# Altium PCB oximonitor.PcbDoc
Units mil, origin at the board's own origin, x right, y up, seen from the top; angles counter-clockwise.
Board outline 4970 x 1515 mil, 2 copper layers (Top Layer, Bottom Layer); 18 components, 11 nets, 43 pads, 1 vias.
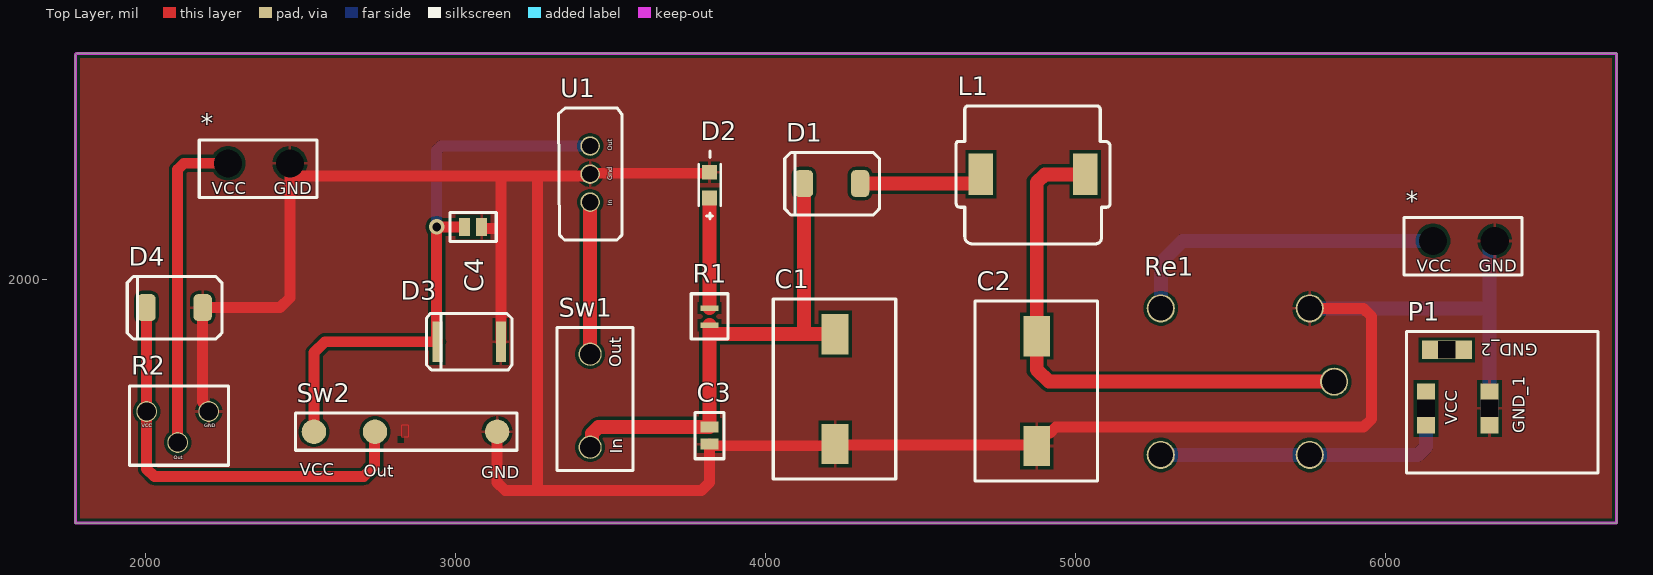
[diagram p0: Top Layer view]
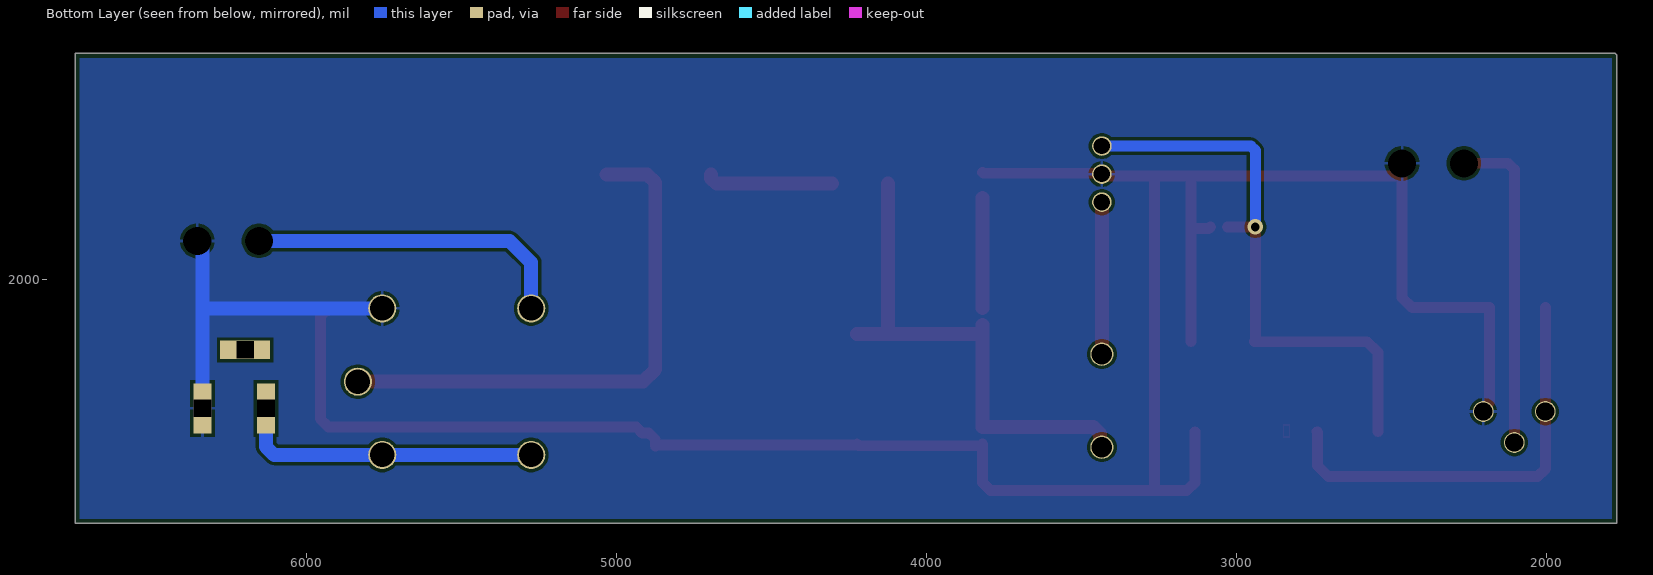
[diagram p1: Bottom Layer view, seen from below]

## Layer stack, top to bottom
Top Solder: solder mask 0.4, Solder Resist, Dk 3.5
Top Layer: signal copper 1.4
Dielectric 1: dielectric 12.6, FR-4, Dk 4.8
Bottom Layer: signal copper 1.4
Bottom Solder: solder mask 0.4, Solder Resist, Dk 3.5

## Board outline
1775,1215 6745,1215 6745,2730 1780,2730 1775,2725

## Design rules (kind name [scope] priority, off if disabled: settings)
Clearance [All] p1: gap=10 ignorepadtopadclearanceinfootprint=FALSE except(0: Arc-Hole Track-Hole SMDPad-Hole THPad-Hole Via-Hole Fill-Hole Poly-Hole Region-Hole Text-Hole)
HoleSize [All] p1: absolutevalues=TRUE maxlimit=150 minlimit=1 maxpercent=80.000 minpercent=20.000
PolygonConnect [All] p1: connectstyle=Relief reliefconductorwidth=10 reliefentries=4 polygonreliefangle="90 Angle" airgapwidth=10
RoutingVias [All] p1: holewidth=28 width=50 viastyle="Through Hole" minholewidth=28 minwidth=50 maxholewidth=28 maxwidth=50
SilkToSolderMaskClearance [IsPad] p1: minsilkscreentomaskgap=3 clearancetoexposedcopper=TRUE
SolderMaskExpansion [All] p1: expansion=4 istentingtop=FALSE
Width [All] p1: maxlimit=45 minlimit=15 preferedwidth=25
28 further rules are at their usual default settings.

## Classes and differential pairs
component class oximonitor: * C1 C2 C3 C4 D1 D2 D3 D4 L1 P1 R1 R2 Re1 Sw1 Sw2 U1

## Components (designator, comment, footprint, x,y, rotation, side; value= is the part's Value field where it differs from the comment)
* "Component_1" "Header 2" 6155,2125 r0 top
* "Component_1" "Header 2" 2270,2375 r0 top
C1 "Capacitor 470uF" "Capacitor SMD 470uF 16V" 4225,1706.22 r270 top
C2 "Capacitor 470uF" "Capacitor SMD 470uF 16V" 4875,1700 r270 top
C3 "Capacitor 0.1uF" "Capacitor 0603 0.1uF" 3820,1525 r270 top
C4 "Capacitor 0.1uF" "Capacitor 0603 0.1uF" 3029.88,2170 r0 top
D1 "Diode 3A 1kV" "Diode 3A - 1kV (SMD)" 4215,2310 r180 top
D2 "LED" "oximonitor led" 3820,2305 r90 top
D3 "Diode zenner 12V 1W" Diode_zenner12V_1W 3045,1800 r180 top
D4 "Diode 3A 1kV" "Diode 3A - 1kV (SMD)" 2095,1910 r180 top
L1 "Inductor 470uH" "Inductor 470uH" 4863.31,2340 r180 top
P1 "Jack DC" "Jack DC" 6335,1585 r90 top
R1 "Resitor 330Ohm" "Resistor 0805" 3820,1880 r90 top
R2 "Pot-hg 200 Ohm" "Pot-hg resistor 220 Ohm" 2005,1575 r0 top
Re1 "Relay" "Relay 12VDC" 5275,1435 r90 top
Sw1 "Dip Switch" "Dip Switch" 3435,1460 r90 top
Sw2 "Touch Switch" "Touch Switch" 2544.45,1510 r0 top
U1 "LM7805" LM7805 3435,2340.55 r90 top

## Footprints (in the part's own frame and the unit in brackets; to place one, negate y for a bottom-side part, rotate by r counter-clockwise, add the part's x,y. Pads: shape width x height; smd on the part's side, far side on the other; paste and mask are expansions set on the pad)
"Capacitor 0603 0.1uF" [mm] "Capacitor 0603 0.1uF"
  rect 0.9x1.5 smd paste-2539.97 mask-2539.97: 1(0,0) 2(1.4,0)
  silkscreen extent -1.2,-1.2 2.6,1.2, body extent -0.25,-0.55 1.65,0.55, height 0.8
"Capacitor SMD 470uF 16V" [mm] "Capacitance: 470uF"
  rect 3.3x2.2 smd paste-2539.97 mask-2539.97: 1(-3,0) 2(6,0)
  silkscreen extent -5.88,-5.07 8.85,4.97, body extent -2.68,-4.21 5.64,4.1, height 3
"Diode 3A - 1kV (SMD)" [mm] "Diode 3A - 1kV"
  rrect50% 1.5x2.2 smd paste-2539.97 mask-2539.97: +(-2.3,0) -(2.3,0)
  silkscreen extent -3.88,-2.55 3.88,2.58, body extent -2.35,-1.97 2.35,1.97, height 2.44
Diode_zenner12V_1W [mm]
  rect 0.8x3.3 smd paste-2539.97 mask-2539.97: +(-2.6,0) -(2.6,0)
  silkscreen extent -3.5,-2.3 3.5,2.3, body extent -2.54,-2.54 2.54,2.54, height 2.6
"Dip Switch" [mm]
  round 1.9 hole 1.7 paste-2539.97 mask-2539.97: In(0,0) Out(7.62,0)
  silkscreen extent -1.9,-3.5 9.8,2.7, body extent -1.05,-2.05 8.85,1.85, height 7.05
"Header 2" [mm]
  round 2 hole 2.3 paste-2539.97 mask-2539.97: GND(5,0) VCC(-0.056,0.009)
  silkscreen extent -2.42,-2.79 7.23,1.91
"Inductor 470uH" [mm] "Inductor 470uH"
  rect 2x3.4 smd paste-2539.97 mask-2539.97: 1(-4.275,0) 2(4.275,0)
  silkscreen extent -6.3,-5.6 6.3,5.7, body extent -5.15,-5.15 5.18,5.07, height 3.8
"Jack DC" [mm] "DC5525"
  rect 4.1x1.5 hole 1.4 square paste-2539.97 mask-2539.97: GND_1(0,0) VCC(0,5.2)
  rect 1.5x4.1 hole 1.4 square paste-2539.97 mask-2539.97: GND_2(4.8,3.5)
  silkscreen extent -5.3,-8.9 6.3,6.8, body extent -4.7,-8.2 4.3,6, height 11
LM7805 [mm]
  round 1.6 hole 1.33 paste-2539.97: GND(0,0) Input(-2.3,0) Output(2.3,0)
  silkscreen extent -5.4,-2.6 5.4,2.6, body extent -5.1,-2.25 5.1,2.25, height 14.48
"oximonitor led" [mm] "led"
  rect 1.2x1.2 smd: +(-1.05,0) -(1.05,0)
  silkscreen extent -2.78,-0.92 2.78,0.9, body extent -1,-0.53 1,0.53, height 0.25
"Pot-hg resistor 220 Ohm" [mm]
  round 1.7 hole 1.5 paste-2539.97 mask-2539.97: GND(5.08,0) Out(2.54,-2.54) VCC(0,0)
  silkscreen extent -1.4,-4.4 6.7,2.1, body extent -0.62,-3.52 5.78,1.23, height 6.6
"Relay 12VDC" [mm]
  round 2.3 hole 2 paste-2539.97 mask-2539.97: In+(0,-12.2) In-(12,-12.2) NC(12,0) NO(0,0) Out(6,-14.2)
  body extent -1.7,-16 13.9,1.6, height 15.8
"Resistor 0805" [mm]
  rect 0.45x1.45 smd paste-2539.97 mask-2539.97: 1(-0.675,0) 2(0.725,0)
  silkscreen extent -1.8,-1.5 1.9,1.5, body extent -0.98,-0.63 1.02,0.67, height 0.25
"Touch Switch" [mm]
  round 2 smd paste-2539.97 mask-2539.97: GND(15,0) Out(5,0) VCC(0,0)
  silkscreen extent -1.52,-1.52 16.64,1.52

## Part data
C3 C4: "Model Samsung 0603. Capacitance 0.1uF"
D1 D4: "https://www.thegioiic.com/1n5408-s3m-smb-diode-chinh-luu-3a-1kv"
D2: "LED 0805"
D3: "https://www.thegioiic.com/zm4742a-gs08-diode-zener-12v-1w-smd"
P1: "https://www.thegioiic.com/dc5525-dau-noi-nguon-dc-cai-5525-han-pcb-kim-2-5mm"
R1: "https://www.thegioiic.com/dien-tro-330-ohm-0805-5-"
R2: "https://www.thegioiic.com/3362w-201-bien-tro-200-ohm-3-chan-tinh-chinh-ngang-0-25w"
Re1: "https://nshopvn.com/product/relay-12vdc-10a/?variant=99218"
Sw1: "https://www.thegioiic.com/cong-tac-1-bit-dip-switch-xuyen-lo-2-54mm-mau-do"
Sw2: "https://www.thegioiic.com/ttp223-phim-cam-ung-dien-dung-1-kenh-v3"
U1: "https://www.thegioiic.com/lm7805ct-cn-ic-on-ap-5v-1-5a"

## Via types
v1: diameter 50, hole 28, Top Layer to Bottom Layer, 1 vias

## Nets (pads, with @x,y where several pads share a name; then routed paths per layer and width w, separated by ;. In a path a pad name is that pad's centre, name@x,y a point inside that pad or via, vN(x,y) a via of type N, cw(c..) or ccw(c..) an arc to the next point about the centre after c; other vN are vias at no path point)
GND: *.GND C1.2 C2.2 C3.2 C4.2 D2.- D3.+ D4.+ P1.GND_1 R2.GND Re1.In- Sw2.GND U1.GND | length 8892.4
  Top Layer w35: R2.GND 2205,1586.35 2185.55,1605.79 D4.+ 2435,1910 2466.85,1941.85 2466.85,2335 ; *.GND@2466.85,2375 2466.85,2335 ; C4.2 3089.43,2165.57 3144.21,2165.57 3147.36,2162.42 ; Sw2.GND 3135,1346.36 3161.36,1320 3265,1320 ; D3.+ 3147.36,2162.42 ; C3.2 C3.2@3820,1464.77 ; D2.- 3817.11,2343.44 3437.89,2343.44 U1.GND 3429.45,2335 3265,2335 ; C2.2@4871.89,1466.89 4228.11,1466.89 C1.2 4219.77,1464.77 C3.2@3820,1464.77 ; C2.2 4875,1485.43 4895.81,1506.24 4917.46,1506.24 4936.22,1525 5928.64,1525 5955,1551.36 5955,1881.08 5928.64,1907.44 Re1.In- ; 2466.85,2335 3147.36,2335 ; 3147.36,2162.42 3147.36,2174.89 3147.36,2335 ; 3147.36,2335 3265,2335 ; 3265,1320 3793.64,1320 3820,1346.36 C3.2@3820,1464.77 ; 3265,1320 3265,2335
  Bottom Layer w45: Re1.In- 6327.56,1907.44 6335,1900 ; P1.GND_1 6335,1900 ; *.GND@6351.85,2125 6351.85,2115.87 6335,2099.02 6335,1900
NC: *.VCC@6152.78,2125.37 Re1.NC | length 1054.5
  Bottom Layer w45: Re1.NC 5275,2055 5345.37,2125.37 *.VCC@6152.78,2125.37
Net*_VCC: *.VCC@2267.78,2375.37 R2.Out | length 1051.2
  Top Layer w35: R2.Out 2105,2355 2125.37,2375.37 *.VCC@2267.78,2375.37
NetC1_1: C1.1 C3.1 D1.- R1.1 Sw1.In | length 1654.2
  Top Layer w45: Sw1.In 3440.7,1465.7 3440.7,1504.34 3461.36,1525 C3.1 3820,1825 ; R1.1 3820,1825 ; D1.- 4124.45,1824.88 4125,1824.33 ; C1.1 4125,1824.33 ; 3820,1825 3820.67,1824.33 4125,1824.33
NetC2_1: C2.1 L1.1 Re1.Out | length 1746.3
  Top Layer w45: L1.1 4901.36,2340 4875,2313.64 C2.1 4875,1710 4913.78,1671.22 Re1.Out
NetD1_+: D1.+ L1.2 | length 409.6
  Top Layer w45: D1.+ 4678.13,2310 4695,2326.87 L1.2
NetD2_+: D2.+ R1.2 | length 355.1
  Top Layer w45: R1.2 D2.+
NetD4_-: D4.- R2.VCC Sw2.Out | length 1390.6
  Top Layer w35: D4.- 2004.72,1909.72 2004.72,1575.28 R2.VCC 2005,1390 2030,1365 2705,1365 2740,1400 2740,1508.7 Sw2.Out
NetP1_VCC: P1.VCC Re1.In+ Re1.NO | length 989.7
  Bottom Layer w45: Re1.NO Re1.In+ 6103.64,1435 6130,1461.36 6130,1584.72 P1.VCC
NetSw1_Out: Sw1.Out U1.Input | length 490
  Top Layer w45: Sw1.Out U1.Input
Vin: C4.1 D3.- Sw2.VCC U1.Output | length 1850.9
  Top Layer w35: Sw2.VCC 2545,1510.55 2545,1765 2580,1800 D3.- 2940,1802.64 2940,2145 ; v1(2940,2170) C4.1
  Bottom Layer w35: v1(2940,2170) 2940,2416.46 2954.64,2431.1 U1.Output
pads on no net: P1.GND_2

## Polygon pours and split planes (outlines as drawn)
GND on Top Layer "GND_L01_P000" (solid, pour order 0): 1785,2710 1795,2720 6725,2720 6735,2710 6735,1235 6725,1225 1790,1225 1785,1230
GND on Bottom Layer "GND_L02_P001" (solid, pour order 1): 1790.29,2714.71 6729.71,2714.71 6730,2714.41 6730,1230 1790.59,1230 1790.29,1230.29

## Keep-outs
Top Layer:
  lines w10: 1775,1215 1775,2725 1780,2730 1955,2730 6745,2730 6745,1215 1775,1215

## Text inside footprints (layer, text, board x,y; h text height)
*: Top Overlay "VCC" at 6100,2025 h39.37; Top Overlay "GND" at 6300,2025 h39.37
*: Top Overlay "VCC" at 2215,2275 h39.37; Top Overlay "GND" at 2415,2275 h39.37
P1: Top Overlay "GND_1" at 6448.36,1504.45 h39.37 r90; Top Overlay "GND_2" at 6490.35,1792.85 h39.37 r180; Top Overlay "VCC" at 6230.51,1532.01 h39.37 r90
R2: Top Overlay "VCC" at 1989.25,1523.82 h11.81; Top Overlay "GND" at 2190.04,1523.82 h11.81; Top Overlay "Out" at 2091.61,1421.46 h11.81
Sw1: Top Overlay "In" at 3539.17,1438.5 h39.37 r90; Top Overlay "Out" at 3535.24,1718.03 h39.37 r90
Sw2: Top Overlay "VCC" at 2499.45,1370 h39.37; Top Overlay "Out" at 2704.45,1365 h39.37; Top Overlay "GND" at 3084.45,1360 h39.37; Top Layer "" at 2824.45,1485 h60
U1: Top Overlay "Gnd" at 3505.87,2320.87 h15.75 r90; Top Overlay "Out" at 3505.87,2415.35 h15.75 r90; Top Overlay "In" at 3505.87,2238.19 h15.75 r90